# Altium PCB dc_cdi.PcbDoc (part 3 of 3)
Units mm, origin at the board's own origin, x right, y up, seen from the top; angles counter-clockwise.
Board outline 67 x 85 mm, 4 copper layers (Signal Top, Gnd, Power, Signal Bottom), stack 0.603 mm thick; 104 components, 72 nets, 386 pads, 139 vias.
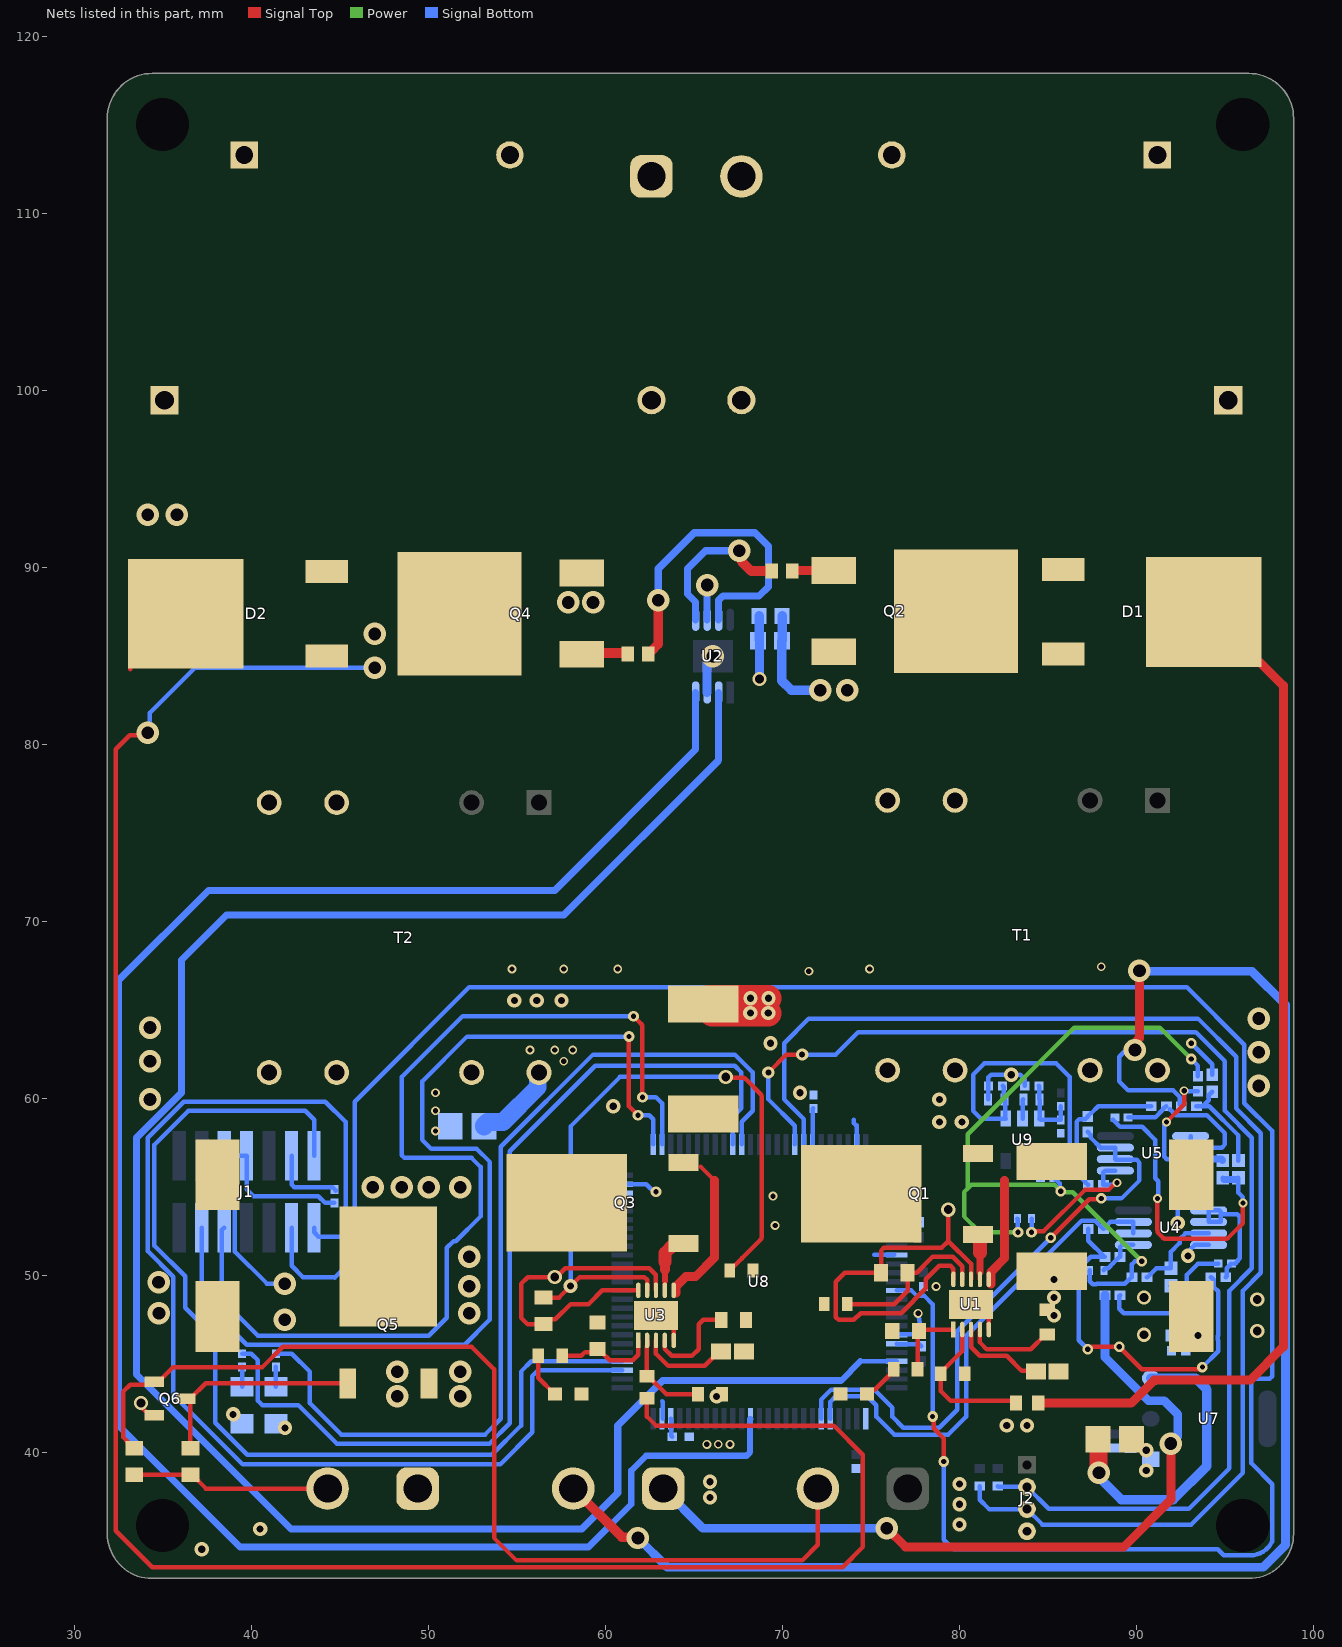
[diagram p4: the nets of this part, all layers, seen from the top]

## Via types
v1: diameter 1.27, hole 0.711, Signal Top to Signal Bottom, 45 vias
v2: diameter 0.8, hole 0.4, Signal Top to Signal Bottom, 36 vias
v3: diameter 0.5, hole 0.3, Signal Top to Signal Bottom, 25 vias
v4: diameter 0.6, hole 0.3, Signal Top to Signal Bottom, 22 vias
v5: diameter 0.8, hole 0.5, Signal Top to Signal Bottom, 9 vias
v6: diameter 0.7, hole 0.35, Signal Top to Signal Bottom, 2 vias

## Nets (pads, with @x,y where several pads share a name; then routed paths per layer and width w, separated by ;. In a path a pad name is that pad's centre, name@x,y a point inside that pad or via, vN(x,y) a via of type N, cw(c..) or ccw(c..) an arc to the next point about the centre after c; other vN are vias at no path point) (continued)
+12: C1.2 C5.1 C7.2 C9.2 C12.1 C14.1 C29.1 C30.1 Q5.3 R2.2 R7.2 T1.7 T1.10 T2.7 T2.10 U1.8 U1.10 U2.6 U3.8 U3.10 U7.3 | length 69.4
  Signal Top w0.254: R7.2@56.515,47.256 55.614,47.256 55.245,47.625 55.245,49.53 55.626,49.911 v5(57.15,49.911) 57.238,49.911 57.746,50.419 62.484,50.419 62.857,50.046 62.857,49.495 62.859,49.493 62.859,49.481 62.865,49.475 U3.8@62.865,49.168 ; R7.2@56.806,47.447 56.888,47.529 57.181,47.529 58.039,48.387 59.055,48.387 59.836,49.168 U3.10@61.865,49.168 ; v5(79.375,53.721) 79.375,51.943 ; U1.10@79.661,49.784 79.655,49.79 79.655,50.393 79.502,50.546 78.867,50.546 78.105,49.784 78.105,49.276 76.708,47.879 74.422,47.879 74.041,47.498 73.174,47.498 73.025,47.647 73.025,49.657 73.533,50.165 R2.2@75.577,50.165 75.577,51.413 75.726,51.562 78.994,51.562 79.375,51.943 ; U1.8@80.661,49.784 80.661,50.657 79.375,51.943
  Signal Top w1: C1.2@87.823,40.767 87.853,40.737 87.853,38.893 v1(87.884,38.862)
  Signal Bottom w0.254: v1(65.756,88.997) v1@65.786,89.027 ; C7.2@68.692,85.917 C7.2@68.627,85.852 C7.2@68.707,85.772 ; v1@87.884,38.608 v1(87.884,38.862)
  Signal Bottom w0.4: U2.6@65.756,87.033 v1(65.756,88.997)
  Signal Bottom w0.5: v5(68.707,83.693) C7.2@68.707,85.772
  Signal Bottom w0.54: C7.2@68.692,85.917 C5.1@68.692,87.259 ; v1@87.884,38.608 89.154,37.338 92.075,37.338 93.98,39.243 93.98,43.561 93.341,44.2 U7.3@90.812,44.2
  Signal Bottom w1: C9.2@53.147,58.42 53.147,58.47 53.347,58.67 54.225,58.67 56.184,60.629 56.184,61.391 T2.10@56.261,61.468
  other v1: 48.26,43.18 51.816,43.18 48.26,44.577 51.816,44.577 34.29,59.944 96.901,60.706 34.29,62.103 96.901,62.611 34.29,64.008 96.901,64.516
+12FIX: P1.2 Q5.2 R50.2 R51.2 | length 11.2
  Signal Top w0.254: R50.2@33.401,38.747 R51.2@36.576,38.747 36.676,38.747 37.45,37.973 P1.2@44.323,37.973
  other v1: 52.324,47.879 52.324,49.403 52.324,51.054 46.863,54.991 48.514,54.991 50.038,54.991 51.816,54.991
GND: C1.1 C3.2 C4.1 C5.2 C6.2 C7.1 C8.2 C9.1 C11.2 C12.2 C13.1 C14.2 C15.2 C16.2 C25.2 C26.2 C27.2 C28.2 C29.2 C30.2 C31.2 C32.2 C33.2 C34.2 C35.2 C36.2 C37.2 J1.5 J1.7 J2.4 led1.1 LED2.1 P1.1 Q2.3 Q4.3 Q6.2 R4.1 R5.1 R6.1 R8.1 R11.1 R12.1 R14.1 R15.1 R21.1 R27.1 R31.2 R34.1 R37.1 T1.4 T2.4 U1.5 U1.11 U2.3 U3.5 U3.11 U4.4 U5.4 U7.1 U8.10 U8.19 U8.26 U8.49 U8.74 U8.99 U9.2 | length 59
  Signal Top w0.254: v5(33.782,42.799) 33.886,42.695 33.886,42.489 34.272,42.103 Q6.2@34.522,42.103 ; U3.11@62.865,47.752 63.167,47.752 63.865,47.054 U3.5@63.865,46.336 ; R15.1@65.861,65.659 R15.1@65.532,65.33 R15.1@66.039,64.823 ; v2(68.193,64.823) v2(68.193,64.823) ; v2@69.205,64.825 v2(69.207,64.826) ; U1.11@80.661,48.368 80.963,48.368 81.661,47.67 U1.5@81.661,46.953
  Signal Top w1.5: R15.1@65.861,65.659 v2(68.199,65.659) v2(69.215,65.659) ; R15.1@66.039,64.823 v2(68.193,64.823) ; v2(68.193,64.823) v2@69.205,64.825
  Signal Bottom w0.254: v1(41.91,49.53) 41.893,49.547 40.894,49.547 39.083,51.357 39.083,54.118 38.481,54.72 J1.5@38.481,56.775 J1.7@39.751,56.775 39.751,54.864 40.132,54.483 43.798,54.483 44.179,54.102 R34.1@44.704,54.102 ; U8.74@60.957,55.157 62.318,55.157 v4@62.865,54.61 ; 63.218,42.903 63.246,42.876 U8.49@63.246,41.907 ; C7.1@69.977,85.852 C7.1@69.992,85.867 ; 74.041,58.801 74.041,58.614 74.153,58.502 ; U8.99@74.2,57.407 74.2,58.502 ; 75.206,51.165 U8.10@76.33,51.165 ; U8.19@76.457,46.657 76.48,46.68 77.541,46.68 77.804,46.943 77.804,47.106 ccw(c77.55,47.106) 77.8,47.151 v3(77.672,47.863) ; C25.2@81.625,59.944 81.633,59.953 81.633,60.697 C26.2@81.642,60.706 81.642,61.192 81.791,61.341 83.439,61.341 83.693,61.087 C28.2@83.693,60.706 ; U9.2@83.566,58.858 83.589,58.881 83.589,59.921 C27.2@83.611,59.944 ; v2(92.329,52.959) 92.329,54.483 93.057,55.211 U5.4@93.057,55.921 ; v2(92.92,51.116) 93.024,51.22 93.024,51.453 93.301,51.73 U4.4@94.073,51.73 ; v4(93.091,63.119) 94.277,61.933 R27.1@94.277,61.33
  Signal Bottom w0.5: U2.3@65.756,82.931 65.756,84.657 v1(66.081,84.982)
  Signal Bottom w0.54: C7.1@69.977,85.852 69.977,83.588 70.507,83.058 v1(72.136,83.058) ; C7.1@69.992,85.867 C5.2@69.992,87.259
  other v1: 41.91,47.498 34.798,47.879 34.771,49.63 73.66,83.058 57.912,88.011 59.309,88.011
  other v2: 37.211,34.544 40.513,35.687 80.01,35.941 80.01,37.084 65.913,37.465 80.01,38.227 65.913,38.354 90.551,38.989 90.551,40.132 41.91,41.402 82.677,41.529 83.82,41.529 38.989,42.164 66.294,43.18 93.472,46.609 85.344,47.752 85.344,48.768 85.344,49.784 78.867,58.674 80.137,58.674 60.452,59.563 78.867,59.944 70.993,60.325 82.931,61.341 69.342,63.119 54.864,65.532 56.134,65.532 57.531,65.532
  other v3: 65.739,40.468 66.381,40.473 67.05,40.468 78.688,49.387 69.596,52.832 69.469,54.483 50.419,58.166 50.419,59.309 50.419,60.325 57.658,62.103 55.753,62.738 57.15,62.738 58.166,62.738 71.501,67.183 54.737,67.31 57.658,67.31 60.706,67.31 74.93,67.31 88.011,67.437
  other v4: 62.865,54.737
  other v5: 90.424,46.657 96.824,46.863 96.824,48.641 90.424,48.768
NetC2_1: C2.1 C3.1 D1.1 D1.3 Q2.4 R3.2 | length 58.7
  Signal Top w0.508: R3.2@84.445,42.799 89.7,42.799 90.995,44.094 96.418,44.094 98.298,45.974 98.298,83.312 96.976,84.634 96.648,84.634 D1.3@93.802,87.48
NetC2_2: C2.2 P2.2 | length 0.6
  Signal Top w0.254: P2.2@67.691,111.495 P2.2@67.691,112.076
NetC4_2: C4.2 U1.3 | length 5.5
  Signal Top w0.254: U1.3@80.661,46.953 80.661,45.958 81.153,45.466 82.677,45.466 83.53,44.613 84.292,44.613 C4.2@84.328,44.577 C4.2@84.482,44.423
NetC6_1: C6.1 R9.2 U1.1 | length 4.2
  Signal Top w0.254: R9.2@77.639,44.704 77.639,46.79 C6.1@77.712,46.863 77.802,46.953 U1.1@79.661,46.953
NetC8_1: C8.1 R9.1 | length 2.1
  Signal Top w0.254: C8.1@74.791,43.307 75.039,43.555 75.213,43.555 76.285,44.627 R9.1@76.285,44.704
NetC10_1: C10.1 C11.1 D2.1 D2.3 Q4.4 R10.2 | length 128.6
  Signal Top w0.254: 33.189,84.253 33.189,84.403 36.162,87.376 D2.3@36.312,87.376 ; v1(34.159,80.645) 34.028,80.514 33.143,80.514 32.36,79.731 32.36,35.585 34.417,33.528 73.406,33.528 74.549,34.671 74.549,39.878 72.898,41.529 62.865,41.529 62.357,42.037 R10.2@62.357,43.063
  Signal Bottom w0.254: v1(34.159,80.645) 34.29,80.776 34.29,81.788 36.83,84.328 v1(46.99,84.328)
  other v1: 46.99,86.233 34.163,92.964 35.814,92.964
NetC10_2: C10.2 P2.1
NetC13_2: C13.2 U3.3 | length 5
  Signal Top w0.254: U3.3@62.865,46.336 62.865,45.593 63.546,44.912 65.625,44.912 66.433,45.72 C13.2@66.542,45.72
NetC15_1: C15.1 R16.2 U3.1 | length 5.5
  Signal Top w0.254: R16.2@57.573,45.466 58.643,45.466 58.859,45.681 59.779,45.681 60.248,45.212 61.549,45.212 61.865,45.528 U3.1@61.865,46.336
NetC16_1: C16.1 R16.1 | length 2.6
  Signal Top w0.254: R16.1@56.219,45.466 56.219,44.225 57.137,43.307 C16.1@57.162,43.307
NetC17_1: C17.1 U4.6 U4.7 U8.30 | length 28.2
  Signal Bottom w0.254: U8.30@72.707,41.907 72.707,42.862 73.025,43.18 74.803,43.18 75.311,42.672 75.311,42.037 76.327,41.021 79.375,41.021 80.391,42.037 80.391,46.592 86.898,53.099 87.66,53.099 87.775,52.983 87.775,52.975 88.114,52.636 C17.1@88.136,52.636 88.157,52.636 88.316,52.795 88.316,52.816 88.53,53.03 U4.7@89.823,53.03 U4.6@89.823,52.38
NetC17_2: C17.2 R18.2 R19.1 | length 21.1
  Signal Top w0.254: v4(87.249,45.847) 87.343,45.847 87.47,45.974 v4(89.027,45.974) 90.297,44.704 v4@93.726,44.704
  Signal Bottom w0.254: v4(87.249,45.847) 86.741,46.355 86.741,50.376 87.419,51.054 88.196,51.054 87.279,51.971 C17.2@87.279,52.636 ; v4(93.726,44.831) 94.615,45.72 94.615,46.355 94.593,46.377 94.593,46.587 94.615,46.609 94.615,49.105 94.363,49.357 94.363,49.763 94.215,49.911 R18.2@94.19,49.911
NetC18_1: C18.1 R20.2 R21.2 | length 6.4
  Signal Bottom w0.254: R20.2@89.071,48.895 89.027,48.851 89.027,48.133 89.281,47.879 93.345,47.879 93.62,48.154 93.62,48.68 C18.1@93.835,48.895
NetC18_2: C18.2 C19.1 R17.1 | length 4.3
  Signal Bottom w0.254: C19.1@91.948,49.421 91.948,49.401 92.181,49.168 92.29,49.168 92.33,49.128 92.602,49.128 92.853,48.877 92.853,50.054 93.472,50.673 R17.1@94.621,50.673
NetC19_2: C19.2 R22.2 U4.3 | length 5.2
  Signal Bottom w0.254: R22.2@90.595,49.911 90.62,49.911 91.11,50.401 C19.2@91.948,50.401 91.948,51.352 92.434,51.838 92.434,52.048 92.766,52.38 U4.3@94.073,52.38
NetC20_1: C20.1 R19.2 U4.5 | length 2.6
  Signal Bottom w0.254: C20.1@88.157,50.292 88.157,50.342 88.23,50.415 88.407,50.415 88.698,50.706 89.046,51.054 R19.2@89.071,51.054 89.098,51.081 89.098,51.639 89.189,51.73 U4.5@89.823,51.73
NetC21_1: C21.1 U5.6 U5.7 U8.31 | length 34
  Signal Top w0.254: v4(85.153,52.133) 87.33,54.31 87.965,54.31 v4(88.011,54.356)
  Signal Bottom w0.254: U8.31@72.207,41.907 72.207,42.997 72.771,43.561 75.184,43.561 76.2,42.545 76.2,42.037 76.835,41.402 78.867,41.402 79.883,42.418 79.883,46.863 v4(85.153,52.133) ; C21.1@87.249,58.118 87.408,57.959 87.408,57.795 U5.7@87.982,57.221 ; U5.7@87.955,57.221 U5.7@87.982,57.221 ; v4(88.011,54.356) 89.154,54.356 90.17,55.372 90.17,56.385 90.021,56.533 88.845,56.533 U5.6@88.807,56.571 U5.7@88.807,57.221 U5.7@87.982,57.221
NetC21_2: C21.2 R24.2 R25.1 | length 8.4
  Signal Bottom w0.254: C21.2@87.249,58.976 87.11,58.837 86.763,58.837 86.614,58.688 86.614,55.792 87.115,55.291 87.115,55.266 87.263,55.118 R25.1@87.288,55.118 ; C21.2@87.249,58.997 87.408,59.156 87.43,59.156 87.836,59.563 R24.2@90.844,59.563
NetC22_1: C22.1 R26.2 R27.2 | length 5.5
  Signal Bottom w0.254: R26.2@93.389,59.563 93.748,59.563 ; R27.2@94.277,60.38 94.079,60.182 94.079,59.894 93.748,59.563 ; C22.1@95.758,56.497 95.758,57.912 94.107,59.563 93.748,59.563
NetC22_2: C22.2 C23.1 R23.1 | length 17
  Signal Top w0.254: v3(91.186,54.356) 91.186,52.556 ccw(c91.44,52.556) 91.26,52.377 91.493,52.144 ccw(c91.672,52.324) 91.672,52.07 95.018,52.07 ccw(c95.018,52.324) 95.197,52.144 96.012,52.959 v3(96.012,54.102)
  Signal Bottom w0.254: R23.1@88.652,58.801 88.677,58.801 88.955,58.523 89.079,58.399 90.318,58.399 91.059,57.658 91.059,55.499 91.232,55.326 91.232,54.402 v3(91.186,54.356) ; C23.1@94.869,55.517 C23.1@94.95,55.436 ; C22.2@95.758,55.517 95.758,54.684 96.012,54.43 v3(96.012,54.102)
  Signal Bottom w0.4: C23.1@94.95,55.436 C22.2@95.676,55.436
NetC23_2: C23.2 R28.2 U5.3 | length 8.4
  Signal Top w0.254: v3(91.694,58.674) 92.694,59.674 v3(92.694,60.436)
  Signal Bottom w0.254: v3(91.694,58.674) 91.567,58.547 91.567,56.72 91.716,56.571 U5.3@93.057,56.571 ; v3(92.694,60.436) 92.709,60.422 93.458,60.422 R28.2@93.472,60.408
  Signal Bottom w0.4: U5.3@93.057,56.571 94.795,56.571 C23.2@94.869,56.497
NetC24_1: C24.1 R25.2 U5.5 | length 9
  Signal Top w0.254: v4(84.074,52.451) 84.12,52.497 84.755,52.497 87.091,54.833 88.421,54.833 88.833,55.245 v3(88.9,55.245)
  Signal Bottom w0.254: v4(84.074,52.451) C24.1@84.074,53.213 ; U5.5@88.807,55.921 88.229,55.921 88.138,55.83 R25.2@88.138,55.118 88.773,55.118 v3(88.9,55.245)
NetC27_1: C27.1 C28.1 R30.2 R31.1 U9.3 | length 3.9
  Signal Bottom w0.254: C28.1@84.493,60.706 84.515,60.684 84.515,59.945 84.526,59.934 84.526,58.868 U9.3@84.516,58.858 84.585,58.789 R31.1@85.725,58.789 R30.2@85.725,59.563
NetC33_1: C33.1 U8.73 | length 1.2
  Signal Bottom w0.254: C33.1@59.784,54.61 60.46,54.61 60.507,54.657 U8.73@60.957,54.657
NetC34_1: C34.1 U8.48 | length 1
  Signal Bottom w0.254: U8.48@63.707,41.907 63.73,41.884 63.73,40.951 C34.1@63.787,40.894
NetD1_2: D1.2 T1.5
NetD2_2: D2.2 T2.5
NetD3_2: LED2.2 R32.1 | length 1.1
  Signal Bottom w0.254: LED2.2@39.497,43.722 R32.1@39.497,44.837
NetD4_2: led1.2 R33.1 | length 1.1
  Signal Bottom w0.254: led1.2@41.402,43.722 R33.1@41.402,44.837
NetJ1_4: J1.4 U8.76 | length 58.3
  Signal Top w0.254: v4(61.341,63.5) 61.341,59.563 v4(61.849,59.055)
  Signal Bottom w0.254: J1.4@37.211,52.705 37.211,48.641 39.751,46.101 52.07,46.101 53.467,47.498 53.467,56.388 53.489,56.41 52.749,57.15 50.165,57.15 49.657,57.658 49.657,60.96 52.197,63.5 v4(61.341,63.5) ; v4(61.849,59.055) 62.484,59.055 62.707,58.832 U8.76@62.707,57.407
NetJ1_6: J1.6 U8.77 | length 59.4
  Signal Top w0.254: v4(61.595,64.643) 62.029,64.209 cw(c61.849,64.03) 62.103,64.03 v4(62.103,60.071)
  Signal Bottom w0.254: J1.6@38.481,52.705 38.354,52.578 38.354,48.641 40.386,46.609 50.038,46.609 51.054,47.625 51.054,51.562 51.435,51.943 51.562,51.943 52.959,53.34 52.959,56.134 52.451,56.642 48.663,56.642 48.514,56.791 48.514,61.214 51.943,64.643 v4(61.595,64.643) ; v4(62.103,60.071) 62.865,60.071 63.207,59.729 U8.77@63.207,57.407
NetJ1_11: J1.11 R34.2 | length 4.3
  Signal Bottom w0.254: J1.11@42.291,56.775 42.291,55.14 42.44,54.991 44.457,54.991 44.473,54.975 44.606,54.975 44.77,54.811 R34.2@44.77,54.786
NetJ1_12: J1.12 U8.14 | length 134.9
  Signal Top w0.254: v4(78.486,42.037) 78.552,41.971 78.552,41.369 79.121,40.8 v4(79.121,39.497)
  Signal Bottom w0.254: J1.12@42.291,52.705 42.291,50.546 42.926,49.911 44.704,49.911 44.726,49.889 45.847,51.01 45.847,59.817 52.324,66.294 92.837,66.294 96.089,63.042 96.089,59.74 97.663,58.166 97.663,44.319 97.514,44.17 96.643,44.17 96.494,44.021 96.494,39.401 97.677,38.218 97.677,35.067 cw(c97.423,35.067) 97.651,34.955 cw(c96.434,35.562) 96.434,34.202 ; U8.14@76.457,49.157 77.293,49.157 77.603,48.847 78.026,48.847 78.486,48.387 v4(78.486,42.037) ; v4(79.121,39.497) 79.121,35.074 79.651,34.544 94.588,34.544 94.93,34.202 96.433,34.202
NetJ1_13: J1.13 U8.54 | length 56.9
  Signal Bottom w0.254: J1.13@43.561,56.775 43.561,58.801 43.053,59.309 36.46,59.309 35.394,58.243 34.544,57.393 34.544,51.689 36.28,49.953 36.28,48.175 37.973,46.482 37.973,41.696 39.791,39.878 53.594,39.878 55.245,41.529 55.245,44.577 55.825,45.157 U8.54@60.957,45.157
NetJ1_14: J1.14 U8.53 | length 67.2
  Signal Bottom w0.254: J1.14@43.561,52.705 43.561,52.44 43.804,52.197 45.19,52.197 45.339,52.346 45.339,58.674 44.196,59.817 36.195,59.817 34.163,57.785 34.163,51.386 35.61,49.939 35.61,43.257 39.517,39.35 54.082,39.35 55.88,41.148 55.88,44.323 56.214,44.657 U8.53@60.957,44.657
NetJ2_2: J2.2 R38.1 U8.92 | length 70.7
  Signal Top w0.254: v6(69.215,61.468) 70.231,62.484 v6(71.12,62.484)
  Signal Bottom w0.254: v6(69.215,61.468) 69.215,59.944 70.707,58.452 U8.92@70.707,57.407 ; v6@71.247,62.484 73.025,62.484 74.295,63.754 93.345,63.754 94.996,62.103 94.996,59.309 96.52,57.785 96.52,50.419 95.25,49.149 95.25,39.116 92.964,36.83 85.05,36.83 J2.2@83.82,38.06 83.796,38.084 82.193,38.084 R38.1@82.169,38.108
NetJ2_3: J2.3 R39.1 U8.93 | length 75.1
  Signal Bottom w0.254: U8.93@71.207,57.407 71.207,58.841 70.104,59.944 70.104,63.119 71.501,64.516 93.472,64.516 95.631,62.357 95.631,59.436 97.028,58.039 97.028,50.165 96.012,49.149 96.012,38.862 93.091,35.941 84.689,35.941 J2.3@83.82,36.81 83.814,36.816 81.675,36.816 81.153,37.338 R39.1@81.153,38.108
NetP3_1: P3.1 R20.1 | length 45.1
  Signal Top w0.5: v1(75.902,35.731) 76.962,34.671 89.281,34.671 91.948,37.338 v1(91.948,40.513)
  Signal Bottom w0.5: P3.1@63.271,37.973 65.513,35.731 v1(75.902,35.731) ; R20.1@88.221,48.895 88.221,45.383 90.678,42.926 91.567,42.926 92.329,42.164 92.329,40.894 v1(91.948,40.513)
NetP3_2: P3.2 R26.1 | length 93.3
  Signal Top w0.5: v1(89.916,62.738) 90.063,62.885 90.063,63.309 90.17,63.416 v1(90.17,67.206)
  Signal Top w0.54: P3.2@58.191,37.973 60.935,35.229 v1@61.799,35.229
  Signal Bottom w0.254: v1@89.662,62.992 89.027,62.357 89.027,60.96 89.535,60.452 92.075,60.452 92.456,60.071 92.456,59.646 R26.1@92.539,59.563
  Signal Bottom w0.5: v1(61.849,35.179) 63.5,33.528 97.155,33.528 98.425,34.798 98.425,65.278 96.52,67.183 90.193,67.183 v1(90.17,67.206)
NetP4_2: P4.2 Q6.1 R50.1 | length 57.9
  Signal Top w0.254: R50.1@33.401,40.247 33.301,40.247 33.028,40.52 33.028,40.62 32.766,40.882 32.766,43.434 33.171,43.839 34.358,43.839 Q6.1@34.522,44.003 34.772,44.003 35.6,44.831 40.64,44.831 41.783,45.974 52.451,45.974 53.721,44.704 53.721,35.179 54.991,33.909 71.12,33.909 72.009,34.798 P4.2@72.009,37.973
NetQ1_1: Q1.1 U1.7 | length 2.6
  Signal Top w0.254: Q1.1@81.054,52.32 Q1.1@81.161,52.213 ; U1.7@81.145,50.173 81.153,50.165 U1.7@81.153,49.792 ; 81.153,51.308 81.161,51.3
  Signal Top w0.4: U1.7@81.153,50.165 81.153,51.308
  Signal Top w0.8: 81.161,51.3 Q1.1@81.161,52.213
NetQ1_2: Q1.2 T1.6 T1.9
NetQ1_3: Q1.3 R6.2 U1.6 | length 6.1
  Signal Top w0.254: 82.423,55.245 82.55,55.372
  Signal Top w0.5: 81.788,49.53 81.788,49.784 ; 81.788,49.975 81.788,50.219 82.55,50.981 82.55,55.372
NetQ2_1: Q2.1 R1.2 | length 2.7
  Signal Top w0.254: R1.2@70.552,89.789 70.58,89.817 R1.2@70.707,89.944 ; Q2.1@72.898,89.817 Q2.1@73.025,89.944
  Signal Top w0.5: R1.2@70.58,89.817 Q2.1@72.898,89.817
NetQ3_1: Q3.1 U3.7 | length 3.1
  Signal Top w0.254: U3.7@63.365,49.481 63.365,49.697 63.373,49.705
  Signal Top w0.354: 63.373,49.705 63.373,50.323
  Signal Top w0.54: 63.373,50.323 63.373,50.768
  Signal Top w0.74: 63.373,50.768 63.373,51.274 63.806,51.707 64.312,51.707 Q3.1@64.417,51.812
NetQ3_2: Q3.2 T2.6 T2.9
NetQ3_3: Q3.3 R15.2 U3.6 | length 8.6
  Signal Top w0.254: 65.405,56.134 66.167,55.372
  Signal Top w0.5: 64.008,49.022 64.008,49.403 64.543,49.938 65.096,49.938 66.167,51.009 66.167,55.372
NetQ4_1: Q4.1 R13.2 | length 2.6
  Signal Top w0.254: Q4.1@58.677,85.076 Q4.1@58.758,85.157
  Signal Top w0.54: Q4.1@58.758,85.157 R13.2@61.214,85.157
NetQ5_1: Q5.1 Q6.3 R51.1 | length 12.4
  Signal Top w0.254: Q6.3@36.322,43.053 Q6.3@36.403,43.053 ; R51.1@36.576,40.247 36.576,42.88 Q6.3@36.403,43.053 ; Q5.1@45.462,43.914 37.433,43.914 36.572,43.053 Q6.3@36.403,43.053
NetR1_1: R1.1 U2.5 | length 9
  Signal Top w0.54: v1(67.564,90.932) 67.704,90.792 67.704,90.327 68.242,89.789 R1.1@69.402,89.789
  Signal Bottom w0.4: U2.5@65.106,87.033 65.106,88.036 64.643,88.499 64.643,89.916 65.659,90.932 v1(67.564,90.932)
NetR2_1: R2.1 R4.2 U1.9 | length 9
  Signal Top w0.254: R4.2@73.675,48.387 76.327,48.387 77.077,49.137 R2.1@77.077,50.165 ; R2.1@77.216,50.165 77.597,50.165 78.486,51.054 79.629,51.054 80.161,50.522 U1.9@80.161,49.784
NetR3_1: R3.1 R5.2 U1.2 | length 8.4
  Signal Top w0.254: R5.2@78.952,44.45 78.952,43.476 79.502,42.926 83.068,42.926 R3.1@83.195,42.799 ; R5.2@78.952,44.527 80.161,45.735 U1.2@80.161,46.953
NetR7_1: R7.1 R11.2 U3.9 | length 39
  Signal Top w0.254: R7.1@56.515,48.756 57.392,48.756 v2(58.039,49.403) 58.547,49.911 62.216,49.911 62.365,49.762 U3.9@62.365,49.168 ; v5(66.802,61.214) 66.846,61.17 67.757,61.17 cw(c67.757,60.916) 67.936,61.096 68.76,60.272 cw(c68.58,60.093) 68.834,60.093 68.834,52.19 cw(c68.58,52.19) 68.759,52.01 67.74,50.995 ccw(c68.041,50.692) 67.713,50.965 cw(c67.518,51.128) 67.699,50.95 R11.2@67.041,50.292
  Signal Bottom w0.254: v2(58.039,49.403) 58.039,58.42 60.833,61.214 v5(66.802,61.214)
NetR8_2: R8.2 U1.4 | length 5
  Signal Top w0.254: U1.4@81.161,46.953 81.161,46.22 81.534,45.847 84.039,45.847 84.863,46.671 R8.2@84.963,46.671
NetR10_1: R10.1 R12.2 U3.2 | length 5.3
  Signal Top w0.254: U3.2@62.365,46.336 62.365,46.029 62.357,46.021 R10.1@62.357,44.313 62.432,44.313 63.438,43.307 R12.2@65.236,43.307
NetR13_1: R13.1 U2.7 | length 19
  Signal Top w0.54: R13.1@62.424,85.09 62.424,85.165 62.504,85.245 62.579,85.245 62.992,85.658 v1(62.992,88.138)
  Signal Bottom w0.4: v1(62.992,88.138) 62.992,89.916 65.024,91.948 68.453,91.948 69.215,91.186 69.215,88.9 68.692,88.377 66.64,88.377 66.406,88.143 U2.7@66.406,87.033
NetR14_2: R14.2 U3.4 | length 5.5
  Signal Top w0.254: U3.4@63.365,46.336 63.365,45.855 63.754,45.466 64.897,45.466 65.278,45.847 65.278,47.244 65.532,47.498 R14.2@66.548,47.498
NetR17_2: R17.2 R18.1 U4.1 U4.2 | length 7.6
  Signal Bottom w0.254: U4.2@94.773,53.03 U4.2@94.682,53.03 ; U4.2@94.773,53.074 U4.2@94.773,53.121 ; R18.1@95.04,49.911 95.091,49.962 95.091,50.418 95.346,50.673 R17.2@95.371,50.673 ; R17.2@95.523,50.673 95.573,50.673 95.721,50.821 95.721,50.857 95.833,50.97 95.833,53.318 95.685,53.467 U4.1@94.773,53.467 ; U4.2@94.682,53.03 U4.2@94.073,53.03 U4.1@94.073,53.68 94.682,53.68 94.773,53.589 U4.1@94.773,53.467 ; U4.2@94.682,53.03 U4.2@94.773,53.121 ; U4.2@94.773,53.121 U4.1@94.773,53.467
NetR23_2: R23.2 R24.1 U5.1 U5.2 | length 9.4
  Signal Bottom w0.254: R23.2@89.529,58.928 91.059,58.928 91.521,59.39 91.521,59.415 91.669,59.563 R24.1@91.694,59.563 ; R24.1@91.883,59.399 92.047,59.235 92.047,59.23 92.222,59.055 93.98,59.055 94.996,58.039 94.996,57.404 94.813,57.221 U5.2@93.057,57.221 U5.1@93.057,57.871
NetR29_2: R29.2 U9.4 | length 1
  Signal Bottom w0.254: U9.4@84.516,56.458 84.552,56.422 84.552,55.535 R29.2@84.588,55.499
NetR32_2: R32.2 U8.85 | length 53.9
  Signal Bottom w0.254: R32.2@39.497,45.587 40.011,45.587 40.386,45.212 40.386,42.926 40.64,42.672 42.672,42.672 44.831,40.513 53.467,40.513 54.61,41.656 54.61,57.023 59.436,61.849 67.31,61.849 67.691,61.468 67.691,59.436 67.183,58.928 67.183,58.405 67.2,58.388 67.2,57.414 U8.85@67.207,57.407
NetR33_2: R33.2 U8.86 | length 52.5
  Signal Bottom w0.254: R33.2@41.402,45.587 42.297,45.587 43.307,44.577 43.307,42.799 45.085,41.021 53.213,41.021 54.102,41.91 54.102,57.277 59.309,62.484 67.31,62.484 68.326,61.468 68.326,59.309 67.707,58.69 U8.86@67.707,57.407
NetR35_2: R35.2 U8.6 | length 1.3
  Signal Bottom w0.254: U8.6@76.457,53.157 77.576,53.157 77.724,53.009 R35.2@77.724,53.003
NetR36_2: R36.2 U8.20 | length 1.5
  Signal Bottom w0.254: U8.20@76.457,46.157 76.48,46.134 77.735,46.134 R36.2@77.851,46.018
NetR37_2: R37.2 U8.94 | length 2.1
  Signal Bottom w0.254: U8.94@71.707,57.407 71.73,57.43 71.73,59.417 R37.2@71.755,59.442
NetU2_2: U2.2 U8.22 | length 116
  Signal Bottom w0.254: 74.406,45.157 U8.22@76.457,45.157
  Signal Bottom w0.35: 73.318,44.069 74.406,45.157
  Signal Bottom w0.4: U2.2@66.406,82.931 66.406,79.106 57.658,70.358 38.608,70.358 36.068,67.818 36.068,60.325 33.528,57.785 33.528,44.415 42.256,35.687 58.674,35.687 60.706,37.719 60.706,41.529 63.246,44.069 73.318,44.069
NetU2_4: U2.4 U8.39 | length 110.1
  Signal Bottom w0.35: 59.055,34.671 61.468,37.084 61.468,38.989 62.308,39.829 67.977,39.829 68.182,40.034 68.182,41.882 U8.39@68.207,41.907
  Signal Bottom w0.4: 59.055,34.671 39.365,34.671 32.512,41.524 32.512,66.675 37.592,71.755 57.15,71.755 65.106,79.711 U2.4@65.106,82.931
VREF: C20.2 C24.2 C25.1 C26.1 R22.1 R28.1 R29.1 U9.1 | length 61.2
  Power w0.254: v4(83.312,52.451) 81.153,52.451 80.264,53.34 80.264,54.715 80.465,54.917 ; v4(90.297,50.8) 86.395,54.702 85.791,54.702 v4(85.725,54.768) 85.375,55.118 80.667,55.118 80.465,54.917 ; v4(93.091,62.23) 91.313,64.008 86.487,64.008 80.465,57.986 80.465,54.917
  Signal Bottom w0.254: C26.1@82.442,60.706 82.496,60.652 82.496,59.998 C25.1@82.55,59.944 82.583,59.911 82.583,58.891 U9.1@82.616,58.858 81.223,58.858 80.772,59.309 80.772,61.341 81.407,61.976 85.471,61.976 86.233,61.214 86.233,56.394 85.461,55.622 85.461,55.597 R29.1@85.363,55.499 ; C24.2@83.274,53.213 83.293,53.194 83.293,52.47 v4(83.312,52.451) ; R29.1@85.338,55.499 R29.1@85.363,55.499 ; v4(85.725,54.768) 85.659,54.834 85.659,55.203 R29.1@85.363,55.499 ; C20.2@87.357,50.292 87.357,49.676 87.525,49.508 87.735,49.508 87.757,49.53 89.339,49.53 89.72,49.911 R22.1@89.745,49.911 89.745,50.629 89.916,50.8 v4(90.297,50.8) ; v4(93.091,62.23) 93.472,61.849 R28.1@93.472,61.258
pads on no net: J1.1 J1.2 J1.8 J1.9 J1.10 P4.1 T1.1 T1.2 T2.1 T2.2 U2.1 U2.8 U2.9 U8.1 U8.2 U8.3 U8.4 U8.5 U8.7 U8.8 U8.9 U8.12 U8.13 U8.15 U8.16 U8.17 U8.18 U8.23 U8.24 U8.25 U8.28 U8.29 U8.32 U8.33 U8.34 U8.35 U8.36 U8.37 U8.38 U8.40 U8.41 U8.42 U8.43 U8.44 U8.45 U8.46 U8.47 U8.51 U8.52 U8.55 U8.56 U8.57 U8.58 U8.59 U8.60 U8.61 U8.62 U8.63 U8.64 U8.65 U8.66 U8.67 U8.68 U8.69 U8.70 U8.71 U8.72 U8.78 U8.79 U8.80 U8.81 U8.82 U8.83 U8.84 U8.87 U8.88 U8.89 U8.90 U8.91 U8.95 U8.96 U8.97 U8.98

## Polygon pours and split planes (outlines as drawn)
GND on Signal Top "GND_L01_P021" (solid, pour order 21): 33.147,58.42 48.387,58.42 54.102,52.705 54.102,50.673 75.184,50.673 77.343,48.514 78.486,49.657 83.439,49.657 83.439,51.054 84.074,51.689 96.774,51.689 99.314,49.149 99.314,34.036 97.79,32.512 32.131,32.512 32.131,57.404
GND on Signal Top "NONET_L-01_P-001" (solid, pour order 23): 57.15,90.424 57.15,87.757 57.658,87.249 59.69,87.249 60.198,87.757 60.198,90.551 59.944,90.805 57.404,90.805
+12 on Power "NONET_L03_P012" (solid, shelved, pour order 12): 31.877,117.983 31.623,117.729 31.623,32.893 98.679,32.893 98.679,117.983
GND on Gnd "NONET_L-01_P-001" (solid, pour order 25): 30.988,116.332 30.988,34.417 33.02,32.385 97.282,32.385 99.314,34.417 99.314,116.586 97.028,118.872 33.528,118.872
GND on Signal Bottom "GND_L04_P022" (solid, pour order 22): 99.441,67.932 31.242,67.932 31.242,34.671 33.782,32.131 97.917,32.131 99.441,33.655

## Other copper
Signal Top:
  region net NetC10_2: 64.262,112.776 64.262,99.06 63.119,97.917 61.722,97.917 60.579,99.06 60.579,113.03 61.214,113.665 63.373,113.665
  region net NetC2_2: 66.167,113.03 66.167,98.933 67.056,98.044 68.834,98.044 69.977,99.187 69.977,112.649 68.961,113.665 66.802,113.665
  region net NetC10_1: 43.18,85.598 43.942,85.598 49.149,90.805 54.483,90.805 54.737,91.059 55.499,91.059 55.499,83.947 54.61,83.058 43.307,83.058 43.053,83.312 43.053,85.344
  region net NetC10_1: 55.562,90.995 51.054,95.504 38.481,95.504 36.449,97.536 35.433,96.52 33.02,96.52 33.02,93.853 33.401,93.472 33.274,93.345 33.274,91.821 38.227,91.821 38.862,91.186 38.989,91.313 47.625,91.313 49.022,89.916 51.562,89.916
  region net +12FIX: 46.482,55.626 52.324,55.626 52.959,54.991 52.959,47.625 52.451,47.117 45.085,47.117 45.085,47.244 44.831,47.498 44.831,53.975
  region net +12: 52.578,42.672 52.197,42.291 47.752,42.291 47.371,42.672 47.371,44.831 47.879,45.339 52.197,45.339 52.578,44.958
  region net GND: 89.408,49.53 89.408,46.228 90.297,45.339 96.901,45.339 97.282,45.72 97.536,45.974 97.536,49.784 89.662,49.784
  region net +12: 91.821,58.166 94.742,58.166 95.631,59.055 95.631,64.643 96.52,65.532 97.79,65.532 97.79,56.896 94.488,53.594 91.948,53.594 91.821,53.721
  region net +12: 33.02,63.627 33.02,57.15 35.179,54.991 35.179,53.975 36.322,52.832 40.005,52.832 40.64,53.467 40.64,57.531 39.878,58.293 37.338,58.293 35.56,60.071 35.56,65.151 35.052,65.659 33.528,65.659 33.02,65.151
  region net GND: 33.655,50.165 33.655,47.498 34.544,46.609 36.068,46.609 36.576,45.974 36.83,45.72 39.878,45.72 40.894,46.736 42.672,46.736 43.18,47.244 43.18,50.038 42.418,50.8 34.29,50.8
  region net NetD2_2: 42.926,90.678 40.513,88.265 40.513,82.169 39.37,81.026 39.37,75.819 39.878,75.311 42.418,75.311 43.053,75.946 42.926,76.073 42.926,78.74 42.418,79.248 42.418,87.503 43.434,88.519 45.593,88.519 45.593,90.424 45.339,90.678
  region net NetD1_2: 84.328,85.725 84.328,82.042 82.804,80.518 76.073,80.518 74.676,79.121 74.676,75.946 75.057,75.565 76.708,75.565 77.089,75.946 77.089,78.105 77.724,78.74 84.582,78.74 87.503,81.661 87.503,85.979 87.122,86.36 84.582,86.36
  region net NetC2_1: 76.327,91.948 80.264,95.885 94.361,95.885 94.361,92.202 90.932,88.773 84.201,88.773 82.931,87.503 82.931,84.455 78.867,84.455 77.47,85.852 77.343,85.852 77.343,86.995 76.327,88.011
  region net GND: 71.628,86.233 71.247,85.852 71.247,82.677 71.628,82.296 74.168,82.296 74.549,82.677 74.549,85.725 74.041,86.233
  region net NetQ3_3: 66.167,50.673 67.564,52.07 67.564,56.769 66.929,56.769 66.167,56.007 66.167,55.88
  region net NetQ3_3: 63.373,59.309 64.008,59.944 67.564,59.944 67.564,56.261 66.802,55.499 63.754,55.499 63.373,55.753
  region net NetQ1_1: 80.264,52.705 80.264,51.435 80.518,51.181 81.788,51.181 81.915,51.308 81.915,52.832 80.391,52.832
  region net NetQ3_1: 62.992,51.308 62.992,52.197 63.119,52.324 64.008,52.324 64.262,52.07 64.059,51.867 64.059,51.707 64.026,51.707 63.754,51.435
  region net NetQ3_2: 50.927,63.119 50.927,57.912 54.483,54.356 54.483,51.308 54.864,50.927 60.96,50.927 61.468,51.435 61.468,56.896 60.452,57.912 56.642,57.912 54.61,59.944 54.61,62.865 53.721,63.754 51.054,63.754
  region net NetQ3_2: 39.624,63.627 42.037,66.04 51.435,66.04 53.975,63.5 53.975,60.706 53.34,60.071 51.816,60.071 50.927,60.96 50.927,63.119 49.911,64.135 43.18,64.135 42.418,63.373 42.418,60.579 41.783,59.944 40.259,59.944 39.624,60.579
  region net NetQ1_3: 80.01,57.658 80.264,57.912 87.503,57.912 87.503,55.499 87.122,55.118 80.391,55.118 80.01,55.499
  region net NetQ1_2: 77.978,62.357 77.978,63.246 79.375,64.643 84.836,64.643 85.852,63.627 85.852,61.214 86.614,60.452 88.011,60.452 88.773,61.214 88.773,64.389 86.233,66.929 76.581,66.929 74.422,64.77 74.422,62.865 75.057,62.865 75.819,62.103 76.073,62.357 76.835,62.357
  region net NetQ1_2: 74.041,60.96 71.247,58.166 71.247,52.578 77.343,52.578 77.978,53.213 77.978,58.674 77.978,62.357 77.089,63.246 74.803,63.246 74.041,62.484 74.041,61.468
  region net NetC10_1: 37.211,93.204 39.878,90.537 39.878,84.506 39.179,83.947 33.528,83.947 32.766,84.709 32.766,106.553 37.211,110.998 37.211,114.3 38.354,115.443 40.894,115.443 42.164,114.173 42.164,108.839 37.211,103.886 37.211,93.932
  region net NetC2_1: 89.408,114.088 89.408,108.204 93.091,104.521 93.091,93.98 90.424,90.932 90.424,83.693 97.663,83.693 97.663,106.553 93.091,111.125 93.091,113.919 92.405,115.062 89.992,115.062
Power:
  region net +12FIX: 42.672,37.084 43.434,36.322 45.212,36.322 46.609,37.719 46.609,46.482 46.99,46.863 52.578,46.863 53.594,47.879 53.594,55.118 52.197,56.515 45.847,56.515 43.688,54.356 43.688,40.64 42.672,39.624 42.672,37.211
Signal Bottom:
  region net +3V3: 90.043,41.91 90.043,41.021 89.789,40.767 88.392,40.767 88.265,40.894 88.265,41.91
  region net +12: 93.218,44.577 92.583,45.212 92.456,45.212 92.456,45.339 92.202,45.593 92.202,46.863 92.075,46.99 91.44,46.99 91.44,46.101 90.424,45.085 90.424,44.196 90.551,44.069 93.472,44.069 93.599,43.942 93.599,44.323
Multi-Layer:
  the board outline again, w0.254

## Silkscreen, mask and mechanical layers (free items; w line width, h text height)
Top Overlay:
  text "1.2" at 69.042,82.587 h3.52 r90
  text "Honda CX 500" at 65.125,65.976 h3.52 r90
  text "DC-CDI" at 69.169,64.711 h6.24 r90
  text "pulse" at 54.232,33.92 h1.52
  text "kill switch" at 67.821,33.665 h1.52
  text "+12VDC" at 39.994,32.896 h1.52 r90
Bottom Overlay:
  lines w0.254: 38.608,59.944 31.877,59.944 30.226,58.293 30.226,51.689 31.242,50.673 44.704,50.673 45.72,51.689 45.72,58.547 45.72,58.928 45.529,59.118 45.148,59.499 44.704,59.944 44.323,59.944
  text "DEBUG" at 44.864,59.331 h2